# EAGLE board ATMega328TargetBoard (EAGLE 6.1)
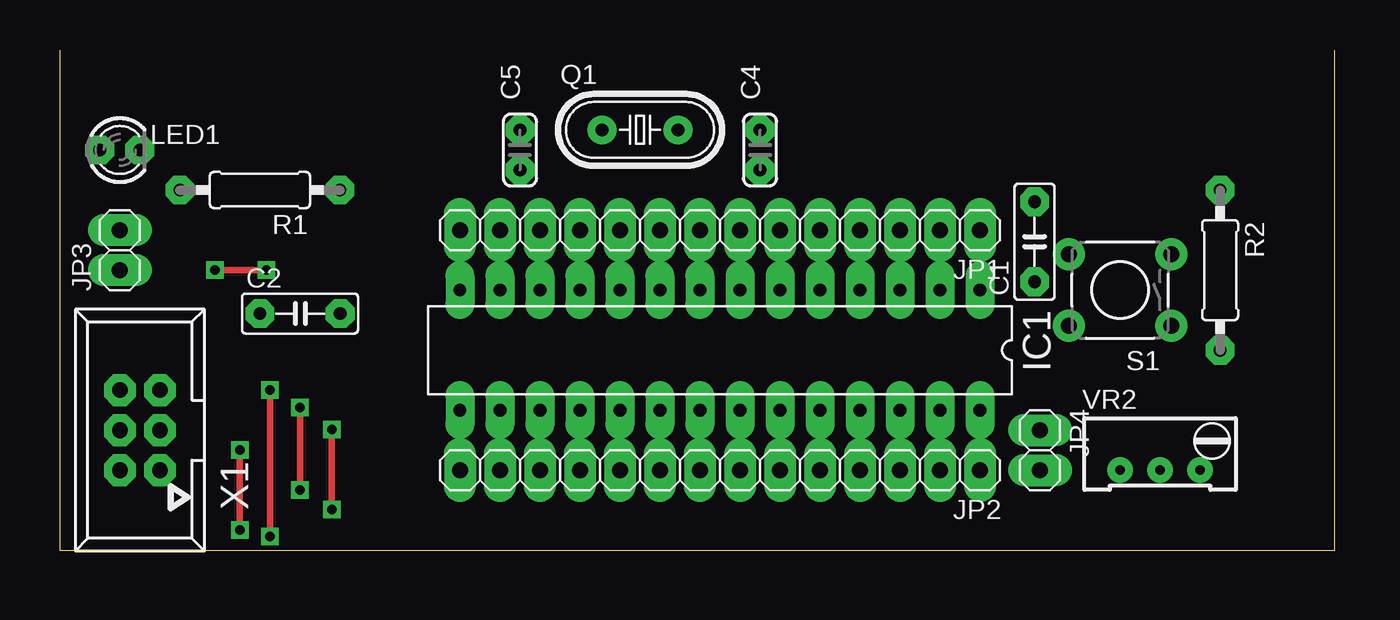
[diagram p0: board, top side]
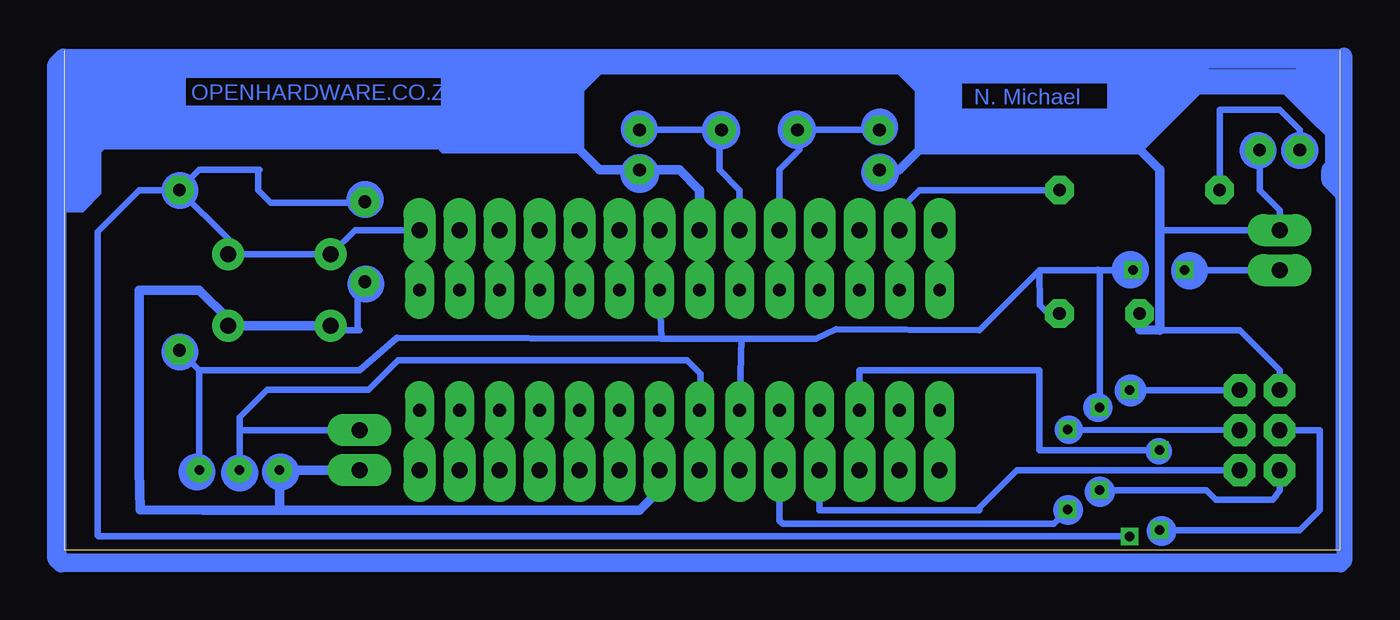
[diagram p1: board, bottom side, seen from below]

Size 80.95 x 31.74 mm. Coordinates in mm from the lower left corner, seen from the top.
Outline: 80.95,31.74 80.95,0 0,0 0,31.74
Copper layers (1*16): Top 0.035mm / dielectric 1.5mm / Bottom 0.035mm
Design rules: minimum track width 10mil, minimum drill 24mil, track to track 8mil, track to pad 8mil, pad to pad 8mil, via to via 8mil, smd to smd 8mil, copper to edge 40mil, drill to drill 8mil, minimum pad ring 20mil, minimum via ring 10mil, stop-mask expansion 4mil, vias tented up to drill 0mil, thermal gap 10mil

## Footprints (pad centres in the part's own frame; a part is rotated, then mirrored left to right if it is on the bottom)
C050-025X075 = drill 0.813 octagon: 1 -2.54,0; 2 2.54,0
C025-040X018 = drill 0.813 pad 1.422 octagon: 1 -1.27,0; 2 1.27,0
DIL28-3 = drill 0.813 long: 1 -16.51,-3.81; 2 -13.97,-3.81; 3 -11.43,-3.81; 4 -8.89,-3.81; 5 -6.35,-3.81; 6 -3.81,-3.81; 7 -1.27,-3.81; 8 1.27,-3.81; 9 3.81,-3.81; 10 6.35,-3.81; 11 8.89,-3.81; 12 11.43,-3.81; 13 13.97,-3.81; 14 16.51,-3.81; 15 16.51,3.81; 16 13.97,3.81; 17 11.43,3.81; 18 8.89,3.81; 19 6.35,3.81; 20 3.81,3.81; 21 1.27,3.81; 22 -1.27,3.81; 23 -3.81,3.81; 24 -6.35,3.81; 25 -8.89,3.81; 26 -11.43,3.81; 27 -13.97,3.81; 28 -16.51,3.81
1X14 = drill 1.016 long: 1 -16.51,0; 2 -13.97,0; 3 -11.43,0; 4 -8.89,0; 5 -6.35,0; 6 -3.81,0; 7 -1.27,0; 8 1.27,0; 9 3.81,0; 10 6.35,0; 11 8.89,0; 12 11.43,0; 13 13.97,0; 14 16.51,0
1X02 = drill 1.016 long: 1 -1.27,0; 2 1.27,0
LED3MM = drill 0.813 octagon: A -1.27,0; K 1.27,0
HC49U-V = drill 0.813: 1 -2.413,0; 2 2.413,0
0207/10 = drill 0.813 octagon: 1 -5.08,0; 2 5.08,0
TACTILE-PTH = drill 1.016 pad 1.88: 1 -3.251,2.261; 2 3.251,2.261; 3 -3.251,-2.261; 4 3.251,-2.261
RTRIM64W = drill 0.61: 1 1.27,-2.54; 2 1.27,0; 3 1.27,2.54
057-006-1 = drill 1 octagon: 1 -2.54,-1.27; 2 -2.54,1.27; 3 0,-1.27; 4 0,1.27; 5 2.54,-1.27; 6 2.54,1.27

## Placement (x,y rotation side)
C1  0.1uF  [C050-025X075]  61.88,19.58 90 top
C2  0.1uF  [C050-025X075]  15.25,15.02 0 top
C4  22pF  [C025-040X018]  44.45,25.4 90 top
C5  22pF  [C025-040X018]  29.21,25.4 90 top
IC1  ATMEGA168-PU  [DIL28-3]  41.91,12.7 180 top
JP1  1-14  [1X14]  41.91,20.32 180 top
JP2  15-28  [1X14]  41.91,5.08 180 top
JP3  Power  [1X02]  3.81,19.05 90 top
JP4  3V3  [1X02]  62.23,6.35 270 top
LED1  red  [LED3MM]  3.81,25.4 0 top
Q1  16MHz  [HC49U-V]  36.83,26.67 0 top
R1  1K  [0207/10]  12.7,22.86 180 top
R2  10K  [0207/10]  73.66,17.78 270 top
S1  Reset Switch  [TACTILE-PTH]  67.31,16.51 180 top
VR2  5K  [RTRIM64W]  69.85,6.35 270 top
X1  057-006-1  [057-006-1]  5.08,7.62 90 top

## Library data of the parts
C1 C2 = rcl
C4 C5 = cap-master
IC1 = Arduino-AVR
JP1-JP4 = pinhead
LED1 = led
Q1 = crystal; OC_FARNELL: 1666969; OC_NEWARK: unknown
R1 R2 VR2 = resistor
S1 = SparkFun
X1 = con-panduit

## Nets
1_RESET: X1.5
2_RX: IC1.2 JP1.2
3_TX: IC1.3 JP1.3
4: IC1.4 JP1.4
5: IC1.5 JP1.5
6: IC1.6 JP1.6
9: C4.2 IC1.9 Q1.2
10: C5.2 IC1.10 Q1.1
11: IC1.11 JP1.11
12: IC1.12 JP1.12
13: IC1.13 JP1.13 R1.1
14: IC1.14 JP1.14
15: IC1.15 JP2.14
16: IC1.16 JP2.13
17_MOSI: IC1.17 JP2.12 X1.4
18_MISO: IC1.18 JP2.11
19_SCK: X1.3
21: JP4.1 VR2.2
23: IC1.23 JP2.6
24: IC1.24 JP2.5
25: IC1.25 JP2.4
26: IC1.26 JP2.3
27: IC1.27 JP2.2
28: IC1.28 JP2.1
+5V: C2.2 IC1.7 IC1.20 JP1.7 JP2.9 JP3.1 R2.2 VR2.3
GND: C2.1 C4.1 C5.1 IC1.8 JP1.8 JP3.2 LED1.K X1.6
N$1: LED1.A R1.2
S$2: IC1.21 JP2.8
S$3: IC1.1 JP1.1 R2.1 S1.3 S1.4
S$5: IC1.22 JP2.7 JP4.2 S1.1 S1.2 VR2.1
S$8: IC1.19 JP2.10
S$13: X1.2

## Tracks (layer width: path | path; a pad name or v marks a point on that pad's centre or on a via)
1_RESET  (via drill 0.6)
  Top 0.406: v13.35,10.16 v13.35,0.87
  Bottom 0.406: X1.5 v13.35,10.16 | v13.35,0.87 78.8,0.88
2_RX
  Bottom 0.406: IC1.2 JP1.2
3_TX
  Bottom 0.406: IC1.3 JP1.3
4
  Bottom 0.406: IC1.4 JP1.4
5
  Bottom 0.406: IC1.5 JP1.5
6
  Bottom 0.406: IC1.6 JP1.6
9
  Bottom 0.406: IC1.9 38.1,22.86 39.37,24.13 39.37,26.54 Q1.2 C4.2
10
  Bottom 0.406: IC1.10 35.56,24.13 34.29,25.4 34.29,26.54 Q1.1 C5.2
11
  Bottom 0.406: IC1.11 JP1.11
12
  Bottom 0.406: IC1.12 JP1.12
13
  Bottom 0.406: IC1.13 JP1.13 27.94,21.59 26.67,22.86 R1.1
14
  Bottom 0.406: IC1.14 JP1.14
15
  Bottom 0.406: JP2.14 IC1.15
16
  Bottom 0.406: JP2.13 IC1.16
17_MOSI  (via drill 0.6)
  Top 0.406: v11.43,1.27 v11.43,6.35
  Bottom 0.406: JP2.12 IC1.17 30.48,11.43 19.05,11.43 19.05,6.35 v11.43,6.35 | X1.4 1.27,7.62 1.27,2.54 2.54,1.27 v11.43,1.27
18_MISO
  Bottom 0.406: IC1.18 JP2.11 33.02,2.54 22.86,2.54
19_SCK  (via drill 0.6)
  Top 0.406: v17.26,7.65 v17.26,2.57
  Bottom 0.406: X1.3 v17.26,7.65
21
  Bottom 0.406: JP4.1 69.85,7.62 VR2.2
23
  Bottom 0.406: JP2.6 IC1.23
24
  Bottom 0.406: JP2.5 IC1.24
25
  Bottom 0.406: JP2.4 IC1.25
26
  Bottom 0.406: JP2.3 IC1.26
27
  Bottom 0.406: JP2.2 IC1.27
28
  Bottom 0.406: JP2.1 IC1.28
+5V  (via drill 0.6)
  Top 0.406: v13.12,17.78 v9.84,17.78
  Bottom 0.406: R2.2 72.39,11.43 | 72.39,11.43 62.23,11.43 59.83,13.49 43.07,13.44 | 43.07,13.44 IC1.7 JP1.7 | 43.07,13.44 37.99,13.44 | 37.99,13.44 33.25,13.44 31.98,14.03 22.86,13.97 19.05,17.78 | 19.05,17.78 v13.12,17.78 | v9.84,17.78 JP3.1 | VR2.3 72.39,11.43 | 37.99,13.44 IC1.20 JP2.9 | C2.2 18.49,15.02 19.03,15.56 19.05,17.78
GND
  Bottom 0.406: LED1.K 5.08,22.86 3.81,21.59 JP3.2 11.43,20.32 | 27.94,24.13 C5.1 | X1.6 3.81,11.43 6.35,13.97 11.43,13.97
  Bottom 0.61: 26.67,25.4 12.7,25.4 11.43,24.13 11.43,20.32 11.43,13.97 12.7,14 C2.1 | 26.67,25.4 27.94,24.13 | 26.67,25.4 26.67,29.21 27.94,30.48 46.99,30.48 48.26,29.21 48.26,25.4 46.99,24.13 C4.1 41.91,24.13 40.64,22.86 JP1.8 IC1.8
N$1
  Bottom 0.406: R1.2 7.62,27.94 3.81,27.94 2.54,26.67 LED1.A
S$1
  Bottom 0.406: 40.58,8.71 40.58,11.2 41.42,12.05 59.79,12.05 61.65,10.18 68.09,10.18 69.85,8.43 69.85,5.04 69.79,4.98
S$2
  Bottom 0.406: JP2.8 IC1.21
S$3
  Bottom 0.406: 68.58,24.13 72.39,24.13 R2.1 | 78.74,20.32 76.2,22.86 R2.1 | R2.1 70.56,19.76 S1.3 S1.4 62.51,20.32 JP1.1 IC1.1
S$4
  Bottom 0.406: 78.85,0.91 78.85,20.2 78.21,20.84
S$5
  Bottom 0.406: 62.23,13.97 63.78,13.97 S1.2 | S1.1 70.56,14.68 | JP2.7 43.18,3.81
  Bottom 0.61: S1.2 S1.1 | 70.56,14.68 72.39,16.51 76.2,16.51 76.2,5.08 76.16,2.57 72.2,2.55 67.31,2.54 | JP2.7 IC1.22 | JP4.2 VR2.1 67.31,2.54 | 43.18,3.81 44.45,2.54 67.31,2.54
S$6
  Bottom 0.406: 62.33,13.97 62.33,16.52 61.82,17.03
S$7
  Bottom 0.406: 61.88,22.07 67.87,22.07 68.66,22.86 68.66,24.05
S$8
  Bottom 0.406: IC1.19 JP2.10 35.56,1.86
S$9
  Bottom 0.406: 35.55,1.89 | 35.55,1.89 35.34,1.68 18.16,1.68 17.32,2.52
S$10
  Bottom 0.406: 6.36,5.07 20.48,5.07 22.95,2.59
S$11  (via drill 0.6)
  other vias: 15.25,9.06
S$12
  Bottom 0.406: 15.22,9.04 15.22,17.68 15.34,17.8
S$13  (via drill 0.6)
  Bottom 0.406: X1.2 3.81,3.81 4.19,3.25 4.24,3.21 7.87,3.21 8.47,3.81 v15.24,3.81
S$14
  Top 0.406: 15.27,3.73 15.27,9.14
S$15
  Bottom 0.406: 0.07,22.81 0.07,0.07 0,0 0,-0.29 0.13,-0.42 80.85,-0.42 81.04,-0.23 81.04,31.57 81.01,31.61 0.13,31.61 0.07,31.54 0.07,21.2
S$16
  Bottom 0.406: 0.2,23.18 0.35,23.18 0.41,24.09 0.41,28.03 2.59,29.2 8.87,29.2 12.56,25.5 26.53,25.5 26.65,25.62 26.65,29.36 27.9,30.61 46.94,30.61 48.39,29.16 48.39,25.46 48.47,25.38 56.91,25.38 57.18,25.66 57.18,26.68 58.44,27.94 73.7,27.94 75.04,26.6 77.51,26.6 78.8,25.31 78.8,22.67 79.83,21.65 80.88,21.65 81,21.53 81,31.16 80.81,31.36
S$17
  Bottom 0.406: 0.17,23.65 0.28,23.65 0.56,24.22 0.56,27.9 2.6,29.65 8.81,29.65 12.72,25.74 26.23,25.74 26.45,25.97
  Bottom 1.016: 26.45,25.97 13.18,25.97 9.1,30.04 2.54,30.04 0.4,28.32 0.4,24.7 0.4,24.27 0.4,31.06 80.44,31.06 80.55,30.95 80.55,22.24 80.49,22.18 79.82,22.18 79.36,22.63 79.36,25.8 78.01,27.16 78.01,26.48 78.06,26.42 78.29,26.42 79.25,25.46 79.25,23.48 80.04,22.69 80.04,30.21 79.76,30.5 48.78,30.5 | 48.78,30.5 47.77,30.5 47.59,30.67 47.59,30.5 48.84,29.25 48.84,25.97 48.78,25.91 52.74,25.91 | 52.74,25.91 56.53,25.91 | 56.53,25.91 56.75,26.14 56.75,27.21 56.81,27.27 57.03,27.27 | 49.41,29.88 48.78,30.5 | 48.78,30.5 48.78,29.7 49.46,29.03 | 52.57,27.84 52.57,26.08 52.74,25.91 | 56.53,25.91 79.59,25.91 79.64,25.97 79.64,26.08 79.08,26.65 56.36,26.65 56.02,26.31 56.02,26.37 56.41,26.76 74.33,26.76 75.35,27.78 73.99,27.78 73.71,27.5 55.91,27.5 55.73,27.33
S$18
  Bottom 1.016: 1.24,30.5 1.24,29.48 0.96,29.2
S$19
  Bottom 1.016: 1.02,29.99 1.81,29.99 2.26,30.44
S$20
  Bottom 1.016: 8.82,30.61 26.96,30.61 27.13,30.44 27.08,30.44 26.11,29.48 26.11,26.71 13.46,26.71
S$21
  Bottom 1.016: 55.96,27.44 55.96,26.65 55.9,26.59 49.63,26.59 49.46,26.76 49.46,28.4 49.52,28.46
S$22
  Bottom 1.016: 79.36,29.03 79.36,28.8 78.8,28.23 74.9,28.23 74.78,28.12 74.78,27.84 74.9,27.72 78.85,27.72 79.08,27.5 75.52,27.5 74.39,28.63
S$23
  Bottom 1.016: 79.08,29.88 79.42,29.54 79.42,26.71 78.97,27.16 78.69,27.16 78.57,27.05 75.12,27.05 73.82,28.35
S$24
  Bottom 1.016: 54.94,28.29 54.77,28.12 50.03,28.12 49.86,27.95 49.86,27.39 49.97,27.27 55.23,27.27
S$25
  Bottom 1.016: 56.3,28.23 56.19,28.23
S$26
  Bottom 1.016: 50.01,27.71 76.89,27.71 77.4,27.2 74.26,27.2 73.95,27.51
S$27
  Bottom 1.016: 73.75,27.63 73.75,30.07 | 73.75,31.01 73.75,30.07 | 73.75,30.07 74.54,29.28 78.97,29.28 78.97,29 78.5,28.53 74.77,28.53 74.77,29.55 74.46,29.87 78.38,29.87 78.5,29.99 75.01,29.99 74.22,30.77 56.72,30.77 56.56,30.62 56.56,27.67 56.68,27.55 56.52,27.55 55.77,28.3 55.77,29.75 55.81,29.79 50.4,29.79 50.16,29.55 50.12,29.55 49.93,29.36 49.93,29.16 50.24,28.85 50.24,28.73 50.83,28.73 51.62,29.52 50.71,29.52 50.12,28.93 51.1,28.93 51.26,29.08 55.27,29.08
S$28
  Bottom 1.016: 13.4,27.55 25.44,27.55 25.38,27.61 25.38,28.4 25.78,28.8 25.78,29.93 25.61,30.1 13.91,30.1 | 10.06,30.1 13.91,30.1 | 14.25,27.27 14.25,29.76 13.91,30.1
S$29
  Bottom 1.016: 25.27,29.42 25.27,28.91 24.82,28.46
S$30
  Bottom 1.016: 24.48,30.72 24.48,27.33
S$31
  Bottom 1.016: 13.29,27.16 13.29,29.82 13.17,29.93
S$32
  Bottom 1.016: 13.17,26.88 13.06,26.88 10.46,29.48
S$33
  Bottom 1.016: 10.74,29.42 12.84,29.42 13.01,29.25
S$34
  Bottom 1.016: 11.37,29.14 11.87,29.14 12.84,28.18
S$35
  Bottom 1.016: -0.28,31.4 -0.28,-0.68 -0.06,-0.91 81.19,-0.91 81.53,-0.57 81.53,30.84 81.03,31.35
S$36
  Bottom 1.016: 2.03,29.41 9.6,29.41
S$37
  Bottom 1.016: -0.2,22.55 -0.2,22.62 0.65,23.47 0.65,24.16 0.36,24.45 0.36,26.48 1.05,27.17 1.08,27.17 3.24,29.33 2.06,29.33 0.69,27.95
(copper drawn outside any net)
  shapes: Bottom circle x24

## Text on the board
Bottom: OPENHARDWARE.CO.ZA | N. Michael